# Altium PCB PCB3.PcbDoc
Units mil, origin at the board's own origin, x right, y up, seen from the top; angles counter-clockwise.
Board outline 2126.15 x 984.42 mil, 2 copper layers (Top Layer, Bottom Layer); 12 components, 31 nets, 136 pads, 60 vias.
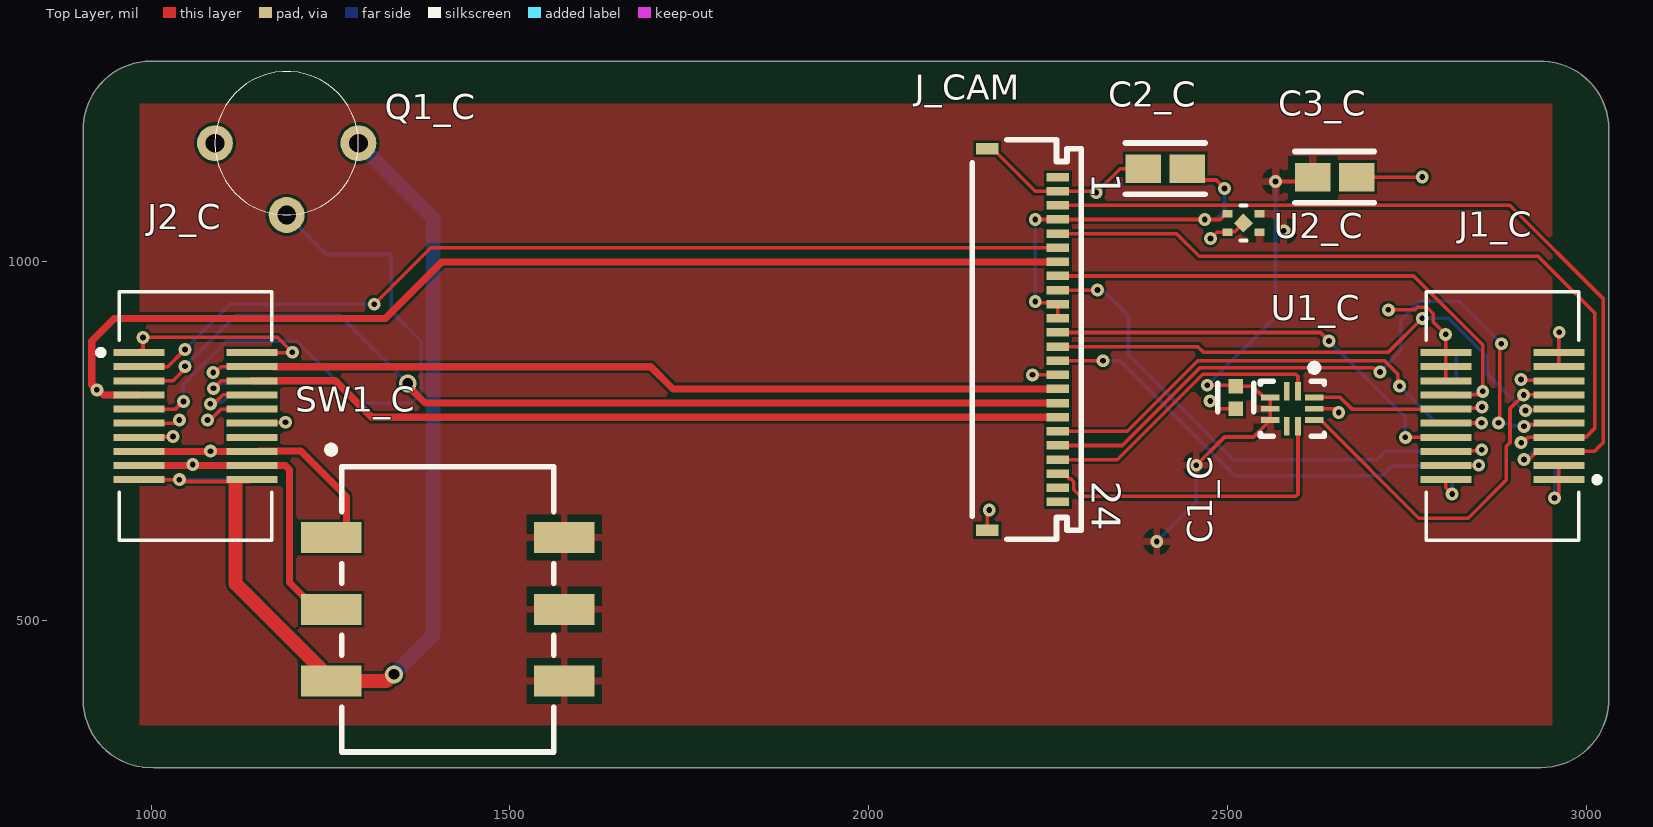
[diagram p0: Top Layer view]
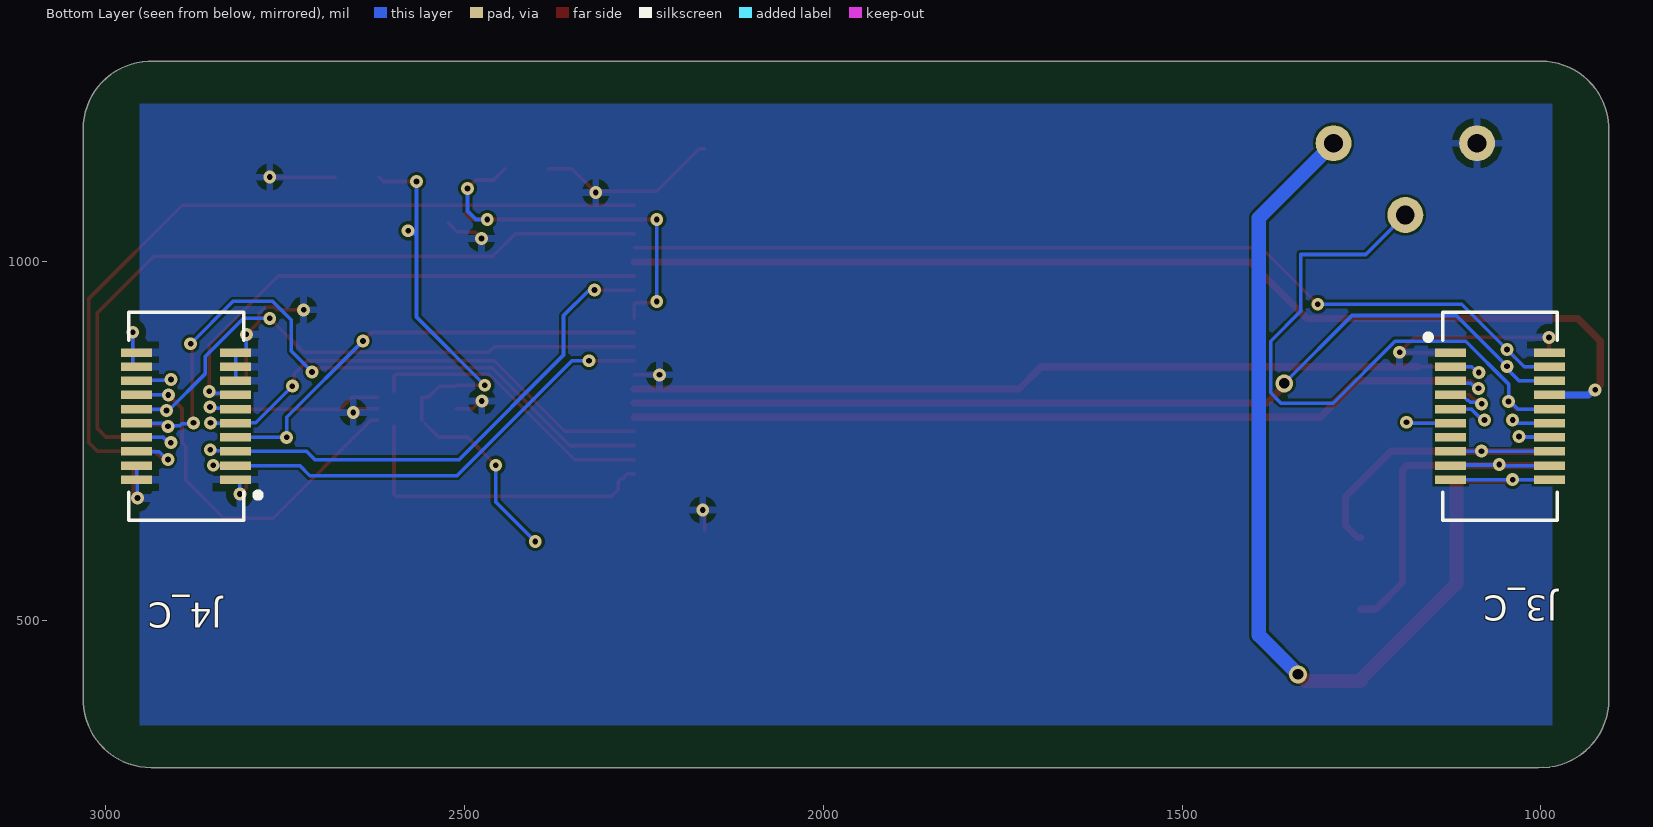
[diagram p1: Bottom Layer view, seen from below]
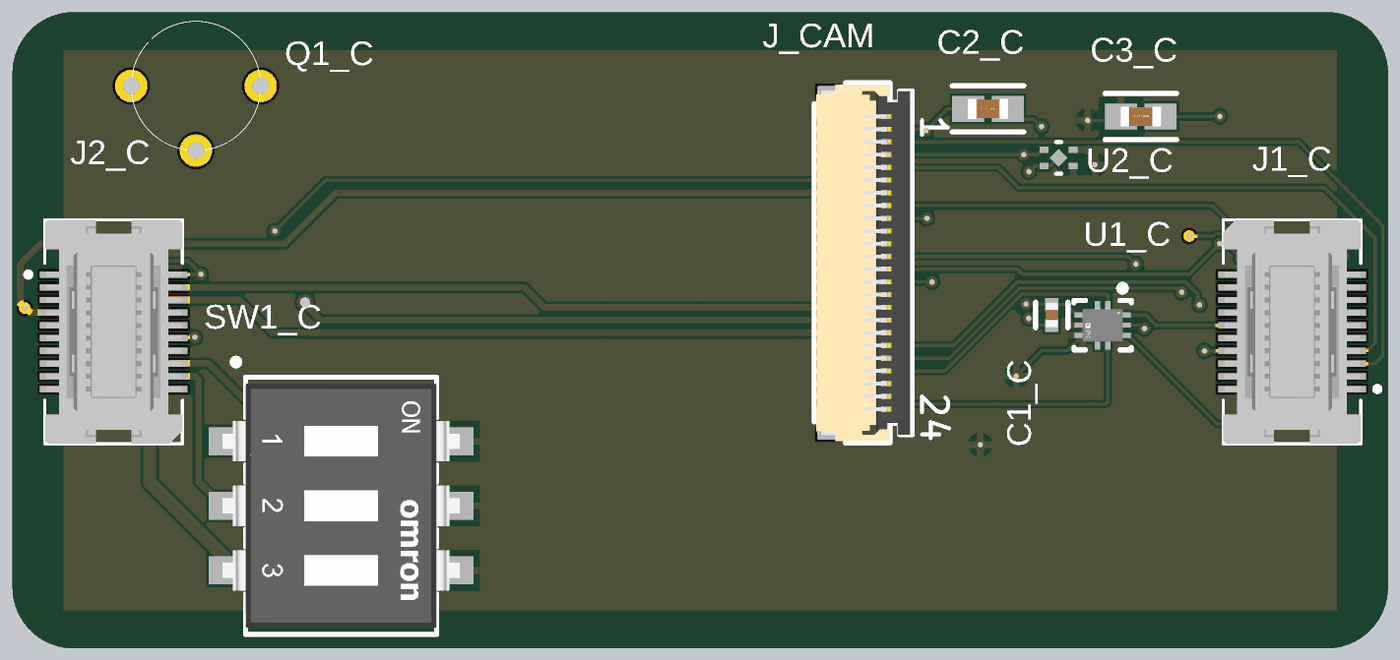
[diagram p2: 3D render of the assembled board from above, using the file's embedded part models]

## Layer stack, top to bottom
Top Solder: solder mask 0.4, Solder Resist, Dk 3.5
Top Layer: signal copper 1.4
Dielectric 1: dielectric 12.6, FR-4, Dk 4.8
Bottom Layer: signal copper 1.4
Bottom Solder: solder mask 0.4, Solder Resist, Dk 3.5

## Board outline
905.51,389.85 905.51,1181.1 cw(c1000,1185.04) 1000,1279.61 2932.99,1279.61 2933.07,1279.53 cw(c2937.01,1185.04) 3031.58,1185.04 3031.58,393.78 3031.5,393.7 cw(c2937.01,389.76) 2937.01,295.19 1004.02,295.19 1003.94,295.28 cw(c1000,389.76)

## Design rules (kind name [scope] priority, off if disabled: settings)
Clearance [All] p1: gap=4 ignorepadtopadclearanceinfootprint=FALSE
PolygonConnect [All] p1: connectstyle=Relief reliefconductorwidth=10 reliefentries=4 polygonreliefangle="90 Angle" airgapwidth=10
RoutingVias [All] p1: holewidth=8 width=18 viastyle="Through Hole" minholewidth=8 minwidth=18 maxholewidth=28 maxwidth=50
SolderMaskExpansion [All] p1: expansion=4 istentingtop=FALSE
Width [All] p1: maxlimit=50 minlimit=4 preferedwidth=5
30 further rules are at their usual default settings.

## Classes and differential pairs
component class Sheet2: C1_C C2_C C3_C J1_C J2_C J3_C J4_C J_CAM Q1_C SW1_C U2_C

## Components (designator, comment, footprint, x,y, rotation, side; value= is the part's Value field where it differs from the comment)
C1_C "C0402C104K8PACTU" FP-C0402-BB-MFG 2511.81,811.02 r270 top value="0.10 μF"
C2_C "UMK107BJ105KA-T" FP-0603-L_1_6_0_1-W_0_8_0-IPC_A 2413.39,1129.92 r180 top
C3_C "UMK107BJ105KA-T" FP-0603-L_1_6_0_1-W_0_8_0-IPC_A 2649.61,1118.11 r0 top
J1_C "52991-0208" MOLEX_52991-0208 2883.24,785 r90 top
J2_C "52991-0208" MOLEX_52991-0208 1061.76,785 r270 top
J3_C "53916-0208" "MOLEX-  539160208" 1047,785 r270 bottom
J4_C "53916-0208" "MOLEX-  539160208" 2898,785 r90 bottom
J_CAM "687124182122" 687124182122 2220.47,891.73 r270 top
Q1_C "AMN2111" AMN21111 1188.98,1165.35 r90 top
SW1_C "A6SN-3101" FP-A6SN-3101-MFG 1413.39,515.75 r270 top
U1_C "ADG824BCPZ-REEL7" FP-CP-10-10-MFG 2590.55,795.28 r270 top
U2_C "S-1318D28-A4T2U4" SMD04_HSNT_1X1_ABL 2522.5,1054.13 r0 top

## Footprints (in the part's own frame and the unit in brackets; to place one, negate y for a bottom-side part, rotate by r counter-clockwise, add the part's x,y. Pads: shape width x height; smd on the part's side, far side on the other; paste and mask are expansions set on the pad)
687124182122 [mm] "ZIF Connectors, Horizontal, Dual Contact Back Locking, pitch 0.5mm, 24p"
  rect 0.3x0.8 smd: 1(-5.75,1.1) 2(-5.25,1.1) 3(-4.75,1.1) 4(-4.25,1.1) 5(-3.75,1.1) 6(-3.25,1.1) 7(-2.75,1.1) 8(-2.25,1.1) 9(-1.75,1.1) 10(-1.25,1.1) 11(-0.75,1.1) 12(-0.25,1.1) 13(0.25,1.1) 14(0.75,1.1) 15(1.25,1.1) 16(1.75,1.1) 17(2.25,1.1) 18(2.75,1.1) 19(3.25,1.1) 20(3.75,1.1) 21(4.25,1.1) 22(4.75,1.1) 23(5.25,1.1) 24(5.75,1.1)
  rect 0.4x0.8 smd: MP1(-6.75,-1.4) MP2(6.75,-1.4)
  silkscreen extent -7.07,-1.92 7.08,1.92, body extent -7,-1.85 7,1.85, height 0.98
AMN21111 [mil]
  round 50 hole 26: 1(0,-100) 2(0,100) 3(-100,0)
  silkscreen extent -100,-100 100,100
FP-0603-L_1_6_0_1-W_0_8_0-IPC_A [mil]
  rect 49.52x39.85 smd paste+0 mask+0: 1(-30.6,0) 2(30.6,0)
  silkscreen extent -55,-36 55,36, body extent -75,-40 75,40, height 10
FP-A6SN-3101-MFG [mm]
  rect 1.1x2.15 smd paste+0 mask+0: 1(-2.54,-4.125) 2(0,-4.125) 3(2.54,-4.125) 4(2.54,4.125) 5(0,4.125) 6(-2.54,4.125)
  silkscreen extent -5.77,-4.25 5.05,3.75, body extent -5.15,-5.3 5.15,5.3, height 0.25
FP-C0402-BB-MFG [mm]
  rect 0.52x0.52 smd paste+0 mask+0: 1(-0.4,0) 2(0.4,0)
  silkscreen extent -0.5,-0.64 0.5,0.64, body extent -0.8,-0.4 0.8,0.4, height 0.25
FP-CP-10-10-MFG [mm]
  rect 0.2x0.655 smd paste+0 mask+0: 1(-0.4,0.777) 4(-0.4,-0.777) 5(0,-0.777) 6(0.4,-0.777) 9(0.4,0.777) 10(0,0.777)
  rect 0.655x0.2 smd paste+0 mask+0: 2(-0.627,0.2) 3(-0.627,-0.2) 7(0.627,-0.2) 8(0.627,0.2)
  silkscreen extent -1.57,-1.12 0.97,1.12, body extent -1.05,-1.2 1.05,1.2, height 0.25
"MOLEX-  539160208" [mm]
  rect 0.3x1.1 smd: 1(-2.25,1.5) 2(-2.25,-2) 3(-1.75,1.5) 4(-1.75,-2) 5(-1.25,1.5) 6(-1.25,-2) 7(-0.75,1.5) 8(-0.75,-2) 9(-0.25,1.5) 10(-0.25,-2) 11(0.25,1.5) 12(0.25,-2) 13(0.75,1.5) 14(0.75,-2) 15(1.25,1.5) 16(1.25,-2) 17(1.75,1.5) 18(1.75,-2) 19(2.25,1.5) 20(2.25,-2)
  silkscreen extent -3.68,-2.89 3.68,1.78, body extent -3.65,-2.3 3.65,1.8, height 3.46
MOLEX_52991-0208 [mm]
  rect 0.25x1.8 smd: 1(-2.25,-2) 2(-2.25,2) 3(-1.75,-2) 4(-1.75,2) 5(-1.25,-2) 6(-1.25,2) 7(-0.75,-2) 8(-0.75,2) 9(-0.25,-2) 10(-0.25,2) 11(0.25,-2) 12(0.25,2) 13(0.75,-2) 14(0.75,2) 15(1.25,-2) 16(1.25,2) 17(1.75,-2) 18(1.75,2) 19(2.25,-2) 20(2.25,2)
  silkscreen extent -4.4,-3.45 4.4,2.7, body extent -4.4,-2.7 4.4,2.7, height 2.28
SMD04_HSNT_1X1_ABL [mil]
  rect 14x10 smd paste+0 mask+0: 1(-22.5,12.8) 2(-22.5,-12.8) 3(22.5,-12.8) 4(22.5,12.8)
  rect 19x19 smd rot 45 paste+0 mask+0: 5(0,0)
  silkscreen extent -4,-24 4,24, body extent 0,0 10,10, height 10

## Part data
C1_C: library part CMP-2008-02046-2, "CAP CER 0.1UF 10V X5R 0402", Capacitance="0.10 μF", Manufacturer=Kemet, Package=C0402-BB, Temperature="-55°C to +125°C", Temperature Characteristic=X5R, Temperature Coefficient=15%, Temperature Range High=+125°C, Temperature Range Low=-55°C, Tolerance=0.1, Voltage Rating="10 V", Automotive=No, Category=Cap, ComponentLink2Description=Datasheet, ComponentLink2URL=https://content.kemet.com/datasheets/KEM_C1002_X7R_SMD.pdf, Device Class L1="Passive Components", Device Class L2=Capacitors, Device Class L3="Ceramic Capacitors", Digikey Description="CAP CER 0.1UF 10V X5R 0402", Height=0.55mm, Ipc Land Pattern Name=CAPC10050X50, Lead Free=Yes, Manufacturer Part Number=C0402C104K8PACTU, Material=Ceramic, Mouser Description="Capacitor 100 nF 10 VDC 0402", Octopart=https://octopart.com/c0402c104k8pactu-kemet-140039, RoHS=TRUE
C2_C C3_C: library part CMP-2000-05447-3, "None", Capacitance=1uF, Case Code (Imperial)=0603, Case Code (Metric)=1608, Dielectric=X5R, Max Operating Temperature=85°C, Min Operating Temperature=-55°C, Package Quantity=1, Tolerance=10%, Voltage Rating=50V, Case/Package=0603, Construction=Flat, Contact Plating=Nickel, Depth=0.8mm, Halogen Free="Halogen Free", Height=0.8mm, Length=1.6mm, Mount="Surface Mount", Number of Pins=2, Packaging="Tape and Reel", Radiation Hardening=No, RoHS Compliant=Yes, Series=M, Termination=SMD/SMT, Thickness=0.035inch, Voltage Rating (DC)=50V, Width=0.031inch
J1_C J2_C: "20 Position Connector Receptacle, Center Strip Contacts Surface Mount Gold", Package=None, Availability=Unavailable, MF=Molex, MP=52991-0208, Price=None, SnapEDA_Link=https://www.snapeda.com/parts/52991-0208/Molex/view-part/230631/?ref=snap
J_CAM: library part CMP-1502-01655-1, "SMT ZIF Connectors WR-FPC, Horizontal, Back Locking Dual Contact, pitch 0.5 mm, 24 pins", Contact Resistance=30mOhm, Manufacturer="Wurth Elektronik", Operating Temperature=-55to85degC, Rated Current=0.5A, Withstanding Voltage=250VAC, Working Voltage=50VAC, Contact Design=BackLockingDualContact, Datasheet URL=https://katalog.we-online.de/em/datasheet/687124182122.pdf, Manufacturer URL=http://www.we-online.de, Mounting Technology=SMT, Orientation=Horizontal, Package Reference=687124182122, Packaging=TapeandReel, Part Number=687124182122, Pin Number=24, Pitch=0.5mm, Publisher=WurthElektronik
SW1_C: library part CMP-08827-000007-1, "SWITCH SLIDE DIP SPST 25MA 24V", Ambient Temperature Range High=+85°C, Ambient Temperature Range Low=-30°C, Contact Resistance=200mΩ, Current Rating=25mA, Manufacturer="Omron Electronics Inc-EMC Div", Temperature="-30°C to +85°C", Voltage Rating Dc=24V, Automotive=No, Category=Switch, ComponentLink2Description=Datasheet, ComponentLink2URL=https://omronfs.omron.com/en_US/ecb/products/pdf/en-a6sn.pdf, Device Class L1=Electromechanical, Device Class L2=Switches, Device Class L3="DIP Switches", Digikey Description="SWITCH SLIDE DIP SPST 25MA 24V", Electromechanical Life=1000Cycles, Height=4.55mm, Lead Free=Yes, Manufacturer Part Number=A6SN-3101, Mouser Description="DIP Switches / SIP Switches 3P Knife-Edge, 2.3mm Slide SMT Flat-Act", Number Of Circuits=3, Octopart=https://octopart.com/a6sn-3101-omron-55396000, Package=A6SN-3101, RoHS=TRUE, Standoff Height=0.7mm, Temperature Range High=+85°C, Temperature Range Low=-30°C, Throw Configuration=SPST
U1_C: library part CMP-09113-000012-1, "IC SWITCH DUAL SPDT 10LFCSP", Manufacturer="Analog Devices", Max Supply Voltage=3.6V, Min Supply Voltage=1.65V, Nominal Supply Current=0.003uA, On State Resistance=0.5Ω, Package=CP-10-10, Temperature="-40°C to +85°C", Temperature Range High=+85°C, Temperature Range Low=-40°C, -3Db Bandwith=90MHz, Automotive=No, Category=IC, ComponentLink2Description=Datasheet, ComponentLink2URL=https://www.analog.com/media/en/technical-documentation/data-sheets/ADG824.pdf, Device Class L1="Integrated Circuits (ICs)", Device Class L2="Interface ICs", Device Class L3="Analog Switches", Digikey Description="IC SWITCH DUAL SPDT 10LFCSP", Footprint Url=https://www.analog.com/media/en/symbols-footprints/symbols/ADG824BCPZ-REEL7.bxl, Height=0.6mm, Interface=LVCMOS, Lead Free=Yes, Manufacturer Part Number=ADG824BCPZ-REEL7, Mux Demux Ratio=1:2, Number Of Circuits=2, Octopart=https://octopart.com/adg824bcpz-reel7-analog+devices-12410880, RoHS=TRUE, Standoff Height=0.02mm, Throw Configuration=SPDT
U2_C: "No Description Available", Mfr_Name=ABLIC, Copyright="Copyright (C) 2022 Ultra Librarian. All rights reserved.", Digi-Key_Part_Number_1=1662-S-1318D28-A4T2U4TR-ND, Digi-Key_Part_Number_2=1662-S-1318D28-A4T2U4CT-ND, Digi-Key_Part_Number_3=1662-S-1318D28-A4T2U4DKR-ND, Manufacturer_Part_Number=S-1318D28-A4T2U4, RefDes=RefDes, Type=DEV

## Via types
v1: diameter 18, hole 8, Top Layer to Bottom Layer, 58 vias
v2: diameter 25, hole 15, Top Layer to Bottom Layer, 2 vias

## Nets (pads, with @x,y where several pads share a name; then routed paths per layer and width w, separated by ;. In a path a pad name is that pad's centre, name@x,y a point inside that pad or via, vN(x,y) a via of type N, cw(c..) or ccw(c..) an arc to the next point about the centre after c; other vN are vias at no path point)
AIN6: J2_C.8 J3_C.8 | length 111.3
  Top Layer w5: v1(1082.62,802.1) 1085.11,804.59 1089.82,804.59 1099.76,814.53 J2_C.8
  Bottom Layer w5: v1(1082.62,802.1) 1085.11,804.59 1098.63,804.59 1101.28,807.25 1102.71,807.25 1109.99,814.53 J3_C.8
AIN7: J2_C.9 J3_C.9 Q1_C.3 | length 928.9
  Top Layer w5: J2_C.9 1034.51,794.84 v1(1045.07,805.4)
  Bottom Layer w5: J3_C.9 1032.29,794.84 1042.84,805.4 v1(1045.07,805.4) 1045.07,829.66 1104.92,889.52 1203.27,889.52 1289.64,803.15 1362.2,803.15 1376.72,817.67 1376.72,889.41 1334.65,931.49 1334.65,1010.24 1244.09,1010.24 Q1_C.3
AVDD: C2_C.1 J_CAM.4 J_CAM.10 J_CAM.11 U2_C.1 | length 568.7
  Top Layer w5: v1(2232.28,944.88) 2234.25,942.91 2261.81,942.91 J_CAM.10 J_CAM.11 ; v1(2232.28,1059.06) J_CAM.4 2490.13,1059.06 2498,1066.93 U2_C.1 ; C2_C.1 2459.88,1114.03 2484.4,1114.03 v1(2496.06,1102.36)
  Bottom Layer w5: v1(2232.28,944.88) 2232.28,1051.18 2228.35,1055.12 v1(2232.28,1059.06) ; v1(2468.5,1059.06) 2484.25,1059.06 2496.06,1070.87 v1(2496.06,1102.36)
CAM_D0: J1_C.4 J4_C.4 J_CAM.14 | length 705
  Top Layer w5: J_CAM.14 v1(2326.77,862.2) ; J1_C.4 2804.71,716.32 2850.18,716.32 v1(2850.39,716.54)
  Bottom Layer w5: v1(2326.77,862.2) 2350.39,862.2 2510.53,702.07 2715.92,702.07 2729.95,716.1 2849.96,716.1 v1(2850.39,716.54)
CAM_D1: J1_C.5 J4_C.5 J_CAM.3 | length 1182.8
  Top Layer w5: J_CAM.3 2893.7,1078.74 3023.62,948.82 3023.62,748.03 3011.38,735.79 J1_C.5 2931.46,735.79 2920.67,725 2913.97,725 v1(2913.39,724.41)
  Bottom Layer w5: v1(2913.39,724.41) 2914.72,724.41 2925.72,735.41 2956.68,735.41 J4_C.5
CAM_D2: J1_C.6 J4_C.6 J_CAM.9 | length 777.7
  Top Layer w5: J_CAM.9 v1(2318.9,960.63) ; J1_C.6 2805.67,736.96 2853.43,736.96 v1(2854.6,738.13)
  Bottom Layer w5: v1(2318.9,960.63) 2326.77,960.63 2362.2,925.2 2362.2,870.08 2507.87,724.41 2708.66,724.41 2720.04,735.79 J4_C.6 2820.43,736.96 2853.43,736.96 v1(2854.6,738.13)
CAM_D3: J1_C.7 J4_C.7 J_CAM.5 | length 1116.1
  Top Layer w5: J_CAM.5 2429.13,1039.37 2460.63,1007.87 2933.07,1007.87 3011.81,929.13 3011.81,767.72 3000,755.91 J1_C.7@2961.98,755.91 ; v1(2909.45,748.03) 2911.6,748.03 2919.04,755.47 J1_C.7
  Bottom Layer w5: v1(2909.45,748.03) 2912.97,748.03 2920.41,755.47 J4_C.7
CAM_D4: J1_C.8 J4_C.8 J_CAM.12 | length 693.9
  Top Layer w5: J_CAM.12 2629.92,901.57 v1(2641.73,889.76) ; v1(2748,755.47) J1_C.8
  Bottom Layer w5: v1(2641.73,889.76) 2748,783.5 2748,758.99 2744.48,755.47 J4_C.8
CAM_D5: J1_C.9 J4_C.9 J_CAM.20 | length 999.4
  Top Layer w5: J_CAM.20 2353.41,744.09 2461.83,852.51 2703.03,852.51 2709.08,846.46 v1(2712.6,846.46) ; v1(2877.95,775.59) 2879.92,777.56 2879.92,883.86 v1(2881.89,885.83) ; v1(2913.47,770.76) 2915.67,772.96 2959.78,772.96 J1_C.9
  Bottom Layer w5: v1(2712.6,846.46) 2741.4,875.26 2741.4,918.57 2767.72,944.88 2822.83,944.88 v1(2881.89,885.83) ; v1(2877.95,775.59) 2879.3,774.24 2894.47,774.24 2896.97,771.74 2912.48,771.74 v1(2913.47,770.76) ; v1@2913.49,775.27 2956.95,775.27 J4_C.9
CAM_D6: J1_C.10 J4_C.10 J_CAM.19 | length 725.6
  Top Layer w5: J_CAM.19 2360.37,763.78 2458.55,861.96 2719.02,861.96 2737.7,843.27 2737.7,829.23 v1(2740.16,826.77) ; J1_C.10 2804.71,775.37 2854.11,775.37 v1(2854.33,775.59)
  Bottom Layer w5: v1(2740.16,826.77) 2791.34,775.59 2818.83,775.59 J4_C.10 2853.9,775.16 v1(2854.33,775.59)
CAM_D7: J1_C.11 J4_C.11 J_CAM.13 | length 830.9
  Top Layer w5: J_CAM.13 2458.78,881.89 2466.4,874.26 2724.66,874.26 v1(2771.65,921.26) ; v1(2915.43,792.67) 2916.52,793.76 2960.89,793.76 J1_C.11
  Bottom Layer w5: v1(2771.65,921.26) 2808.33,921.26 2861.76,867.83 2861.76,843.8 2912.89,792.67 v1(2915.43,792.67) ; v1@2915.19,794.84 J4_C.11
CAM_SCL: J_CAM.21 U1_C.2 | length 405.7
  Top Layer w5: J_CAM.21 2346.46,724.41 2465.55,843.51 2595.28,843.51 2598.43,840.37 U1_C.2
CAM_SDA: J_CAM.22 U1_C.8 | length 450.4
  Top Layer w5: J_CAM.22 2273.62,704.72 2277.03,701.32 2277.03,700.37 2279.96,697.44 2282.22,697.44 2286.03,693.64 2286.03,682.48 2295.28,673.23 2595.5,673.23 2598.43,676.16 U1_C.8
GND: C1_C.2 C2_C.2 C3_C.2 J1_C.1 J1_C.2 J1_C.3 J1_C.16 J1_C.17 J1_C.18 J1_C.19 J1_C.20 J2_C.1 J2_C.2 J3_C.1 J3_C.2 J4_C.1 J4_C.2 J4_C.3 J4_C.16 J4_C.17 J4_C.18 J4_C.19 J4_C.20 J_CAM.2 J_CAM.15 J_CAM.MP1 J_CAM.MP2 Q1_C.2 U1_C.10 U2_C.2 U2_C.5 | length 1327.8
  Top Layer w5: J2_C.1 988.68,879.24 v1(988.68,894.73) 1176.14,894.73 v1(1196.85,874.02) 1196.42,873.58 J2_C.2 ; J_CAM.MP2 2165.35,651.27 v1(2168.17,654.09) ; J_CAM.MP1 2173.23,1157.48 2232.28,1098.43 J_CAM.2 2315.38,1098.43 v1(2317.24,1096.56) 2350.6,1129.92 C2_C.2 ; v1(2228.35,842.52) J_CAM.15 ; v1(2476.1,805.96) 2478.06,805.96 2488.75,795.28 C1_C.2 ; v1(2476.61,1032.65) 2485.3,1041.34 U2_C.2 2500.77,1042.11 2510.48,1042.11 U2_C.5 ; U1_C.10 2650.03,795.28 v1(2655.23,790.08) ; C3_C.2 v1(2771.65,1118.11) ; v1(2724.41,933.07) 2761.54,933.07 2765.23,936.76 2778.07,936.76 2787.15,927.68 2787.15,916.16 v1(2804.3,899.01) 2804.5,898.82 J1_C.20 J1_C.18 J1_C.16 ; J1_C.2 2804.5,685.25 v1(2813.27,676.48) ; v1(2956.07,670.78) 2961.98,676.69 J1_C.1 J1_C.3 ; J1_C.17 J1_C.19 2961.98,901.27 v1(2962.6,901.9)
  Bottom Layer w5: v1(2804.3,899.01) 2804.3,876.99 2807.71,873.58 J4_C.20 J4_C.18 J4_C.16 ; v1(2813.27,676.48) 2813.27,693.01 2816.68,696.42 J4_C.2 ; v1(2956.07,670.78) 2956.07,693.01 2957.06,694 J4_C.1 J4_C.3 ; J4_C.17 2959.2,853.9 2962.6,857.3 v1(2962.6,901.9)
HSYNC: J2_C.4 J3_C.4 J_CAM.16 | length 1236.1
  Top Layer w5: v1(1086.48,845.78) 1089.45,845.78 1097.57,853.9 J2_C.4 J2_C.4@1170.94,853.9
  Top Layer w10: J2_C.4@1170.94,853.9 1696.41,853.9 1727.48,822.83 J_CAM.16
  Bottom Layer w5: v1(1086.48,845.78) 1088.47,845.78 1096.59,853.9 J3_C.4
INT: J2_C.6 J3_C.6 J_CAM.18 | length 1245.3
  Top Layer w5: v1(1086.98,823.67) 1097.52,834.21 J2_C.6
  Top Layer w10: J2_C.6 1256.66,834.21 1307.41,783.46 J_CAM.18
  Bottom Layer w5: v1(1086.98,823.67) 1090.5,823.67 1097.64,830.81 1122.33,830.81 J3_C.6
MCLK: J1_C.14 J4_C.14 J_CAM.8 | length 788.8
  Top Layer w5: J_CAM.8 2759.84,980.32 2855.9,884.26 v1(2855.9,819.56) 2852.38,819.56 2847.35,814.53 J1_C.14
  Bottom Layer w5: J4_C.14 2821.81,817.07 2853.41,817.07 v1(2855.9,819.56)
PCIF_D8: J1_C.12 J4_C.12 U1_C.1 | length 278.4
  Top Layer w5: U1_C.1 2657.48,811.02 2673.66,794.84 J1_C.12 2805.87,796.21 2853.57,796.21 v1(2854.94,797.58)
  Bottom Layer w5: J4_C.12 2820.63,796.21 2853.57,796.21 v1(2854.94,797.58)
PCIF_D9: J1_C.13 J4_C.13 U1_C.9 | length 568
  Top Layer w5: U1_C.9 2630.11,779.53 2766.78,642.86 2835.77,642.86 2888.89,695.97 2888.89,743.22 2893.95,748.28 2893.95,795.52 v1(2912.95,814.53) J1_C.13
  Bottom Layer w5: v1(2912.95,814.53) J4_C.13
PCIF_PCLK: J2_C.5 J3_C.5 J_CAM.17 | length 1442.7
  Top Layer w5: J2_C.5 983.24,834.43 1030.86,834.43 1047.24,850.81 v1(1047.24,854.33)
  Top Layer w10: v2(1357.72,830.71) 1357.72,827.32 1381.89,803.15 J_CAM.17
  Bottom Layer w5: J3_C.5 1030.64,834.21 1047.24,850.81 v1(1047.24,854.33) 1118.11,925.2 1263.23,925.2 v2(1357.72,830.71)
PCIF_VSYNC: J2_C.3 J3_C.3 J_CAM.6 | length 1418.7
  Top Layer w5: J2_C.3 1023.19,853.9 v1(1047.24,877.95) ; v1(1311.02,940.94) 1389.76,1019.69 J_CAM.6
  Bottom Layer w5: J3_C.3 1023.19,853.9 1110.24,940.94 v1(1311.02,940.94)
PDOWN: J2_C.12 J3_C.12 | length 109.7
  Top Layer w5: J2_C.12 1141.15,775.81 1186.79,775.81 v1(1187.44,776.46)
  Bottom Layer w5: J3_C.12 1186.14,775.16 v1(1187.44,776.46)
PT0: J2_C.10 J3_C.10 | length 121.5
  Top Layer w5: v1(1078.74,779.53) 1082.26,779.53 1097.57,794.84 J2_C.10
  Bottom Layer w5: v1(1078.74,779.53) 1081.97,779.53 1097.28,794.84 J3_C.10
PT1: J2_C.11 J3_C.11 | length 111.4
  Top Layer w5: J2_C.11 1031.48,775.16 1035.85,779.53 v1(1039.37,779.53)
  Bottom Layer w5: J3_C.11 1031.48,775.16 1035.85,779.53 v1(1039.37,779.53)
SQWOUT: J2_C.13 J3_C.13 | length 90.6
  Top Layer w5: J2_C.13 983.51,755.96 1029.89,755.96 v1(1030.38,756.45)
  Bottom Layer w5: J3_C.13 988.43,755.96 1029.89,755.96 v1(1030.38,756.45)
TMR3A_IOB: J1_C.15 J4_C.15 | length 102.3
  Top Layer w5: v1(2909.18,836.2) 2910.17,835.21 2960.98,835.21 J1_C.15
  Bottom Layer w5: v1(2909.18,836.2) 2910.17,835.21 2956.06,835.21 J4_C.15
TRIG: J2_C.7 J3_C.7 J_CAM.7 | length 1591.2
  Top Layer w10: J2_C.7 933.65,814.53 926.57,821.61 v1(924.41,821.61) 917.32,828.69 917.32,889.76 948.82,921.26 1326.77,921.26 1405.51,1000 J_CAM.7
  Bottom Layer w10: v1(924.41,821.61) 926.57,821.61 933.65,814.53 J3_C.7
VCC: C1_C.1 C3_C.1 SW1_C.4 SW1_C.5 SW1_C.6 U1_C.4 U1_C.5 U1_C.6 U2_C.3 U2_C.4 | length 769
  Top Layer w5: v1(2456.69,716.54) 2496.06,755.91 2536.32,755.91 2554.94,774.53 ; v1(2471.98,828.01) 2510.57,828.01 C1_C.1 2535.24,826.77 2550.99,811.02 U1_C.4 U1_C.5 U1_C.6 ; v1(2567.11,1112.02) 2612.91,1112.02 C3_C.1
  Bottom Layer w5: v1(2401.57,610.24) 2456.69,665.35 v1(2456.69,716.54) ; v1(2471.98,828.01) 2567.11,923.14 2567.11,1039.37 ; v1(2567.11,1112.02) 2567.11,1039.37 ; v1(2578.74,1043.31) 2574.8,1039.37 2567.11,1039.37
VCC_4: J2_C.15 J2_C.16 J3_C.15 J3_C.16 SW1_C.1 | length 522.3
  Top Layer w10: J2_C.15 J2_C.16 1149.17,735.79 1149.61,736.22 1208.66,736.22 1272.18,672.7 1272.18,632.4 1255.53,615.75 SW1_C.1
  Bottom Layer w5: J3_C.15 v1@1082.68,735.79 ; v1(1082.68,736.22) v1@1082.68,735.79 ; J3_C.16 v1@1082.68,735.79
VCC_5: J2_C.17 J2_C.18 J3_C.17 J3_C.18 SW1_C.2 | length 582
  Top Layer w10: J2_C.17 1058.04,716.1 1187.06,716.1 1192.91,710.24 1192.91,553.15 1230.31,515.75 SW1_C.2
  Bottom Layer w5: J3_C.17 1056.56,716.1 v1(1058.04,717.58) 1058.78,716.84 1125,716.84 J3_C.18
VCC_6: J2_C.19 J2_C.20 J3_C.19 J3_C.20 Q1_C.1 SW1_C.3 | length 1545.7
  Top Layer w5: J2_C.19 v1(1039.37,696.42) 1041.94,693.85 1137.93,693.85 J2_C.20 1138.08,698.84 J2_C.20@1120.62,694.81
  Top Layer w20: 1117.68,688.98 1117.68,551.61 SW1_C.3@1253.54,415.75 ; SW1_C.3 SW1_C.3@1253.54,415.75 ; v2(1338.58,425.2) 1337.23,425.2 1327.78,415.75 SW1_C.3@1253.54,415.75
  Bottom Layer w5: J3_C.19 v1(1039.37,696.42) J3_C.20
  Bottom Layer w20: Q1_C.1 1393.22,1061.11 1393.22,479.84 v2(1338.58,425.2)
pads on no net: J2_C.14 J3_C.14 J_CAM.1 J_CAM.23 J_CAM.24 U1_C.3 U1_C.7

## Polygon pours and split planes (outlines as drawn)
GND on Bottom Layer "GND_L02_P000" (solid, pour order 0): 984.25,1220.47 984.25,354.33 2952.76,354.33 2952.76,1220.47
VCC on Top Layer "VCC_L01_P001" (solid, pour order 1): 2952.76,1220.47 2952.76,354.33 984.25,354.33 984.25,1220.47

## Silkscreen, mask and mechanical layers (free items; w line width, h text height)
Mechanical 1:
  lines w1: 905.43,389.76 ccw(c1000,389.76) 1003.94,295.28 ; 905.51,389.85 905.51,1181.1 cw(c1000,1185.04) 1000,1279.61 2932.99,1279.61 ; 1004.02,295.19 2937.01,295.19 ccw(c2937.01,389.76) 3031.5,393.7 ; 2933.07,1279.53 cw(c2937.01,1185.04) 3031.58,1185.04 3031.58,393.78

## Dimensions
2932.99,1279.61 to 2937.01,295.19 on Mechanical 1
905.51,1181.1 to 3031.58,1185.04 on Mechanical 1

## Text inside footprints (layer, text, board x,y; h text height)
J_CAM: Top Overlay "1" at 2311.02,1124.02 h40 r270; Top Overlay "24" at 2311.02,694.88 h40 r270